# EAGLE board easyface485 (EAGLE 6.4)
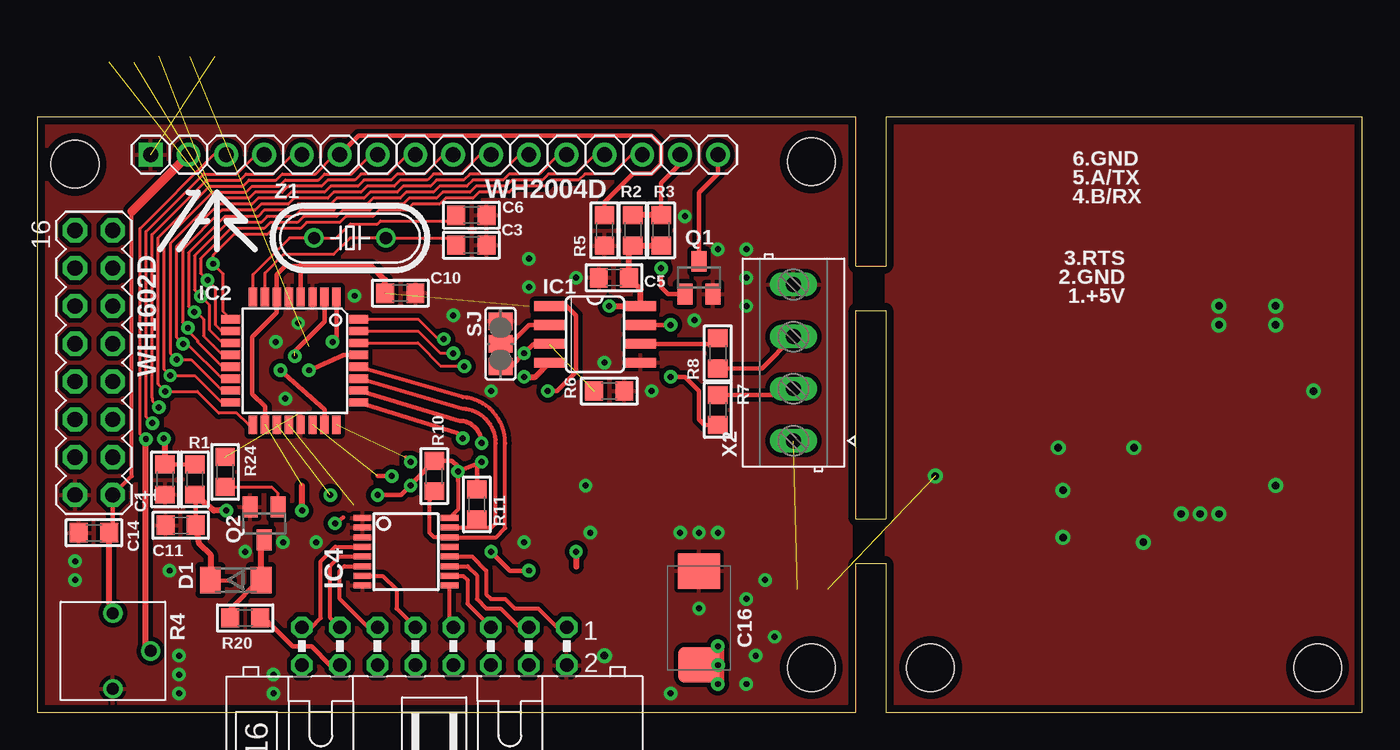
[diagram p0: board, top side]
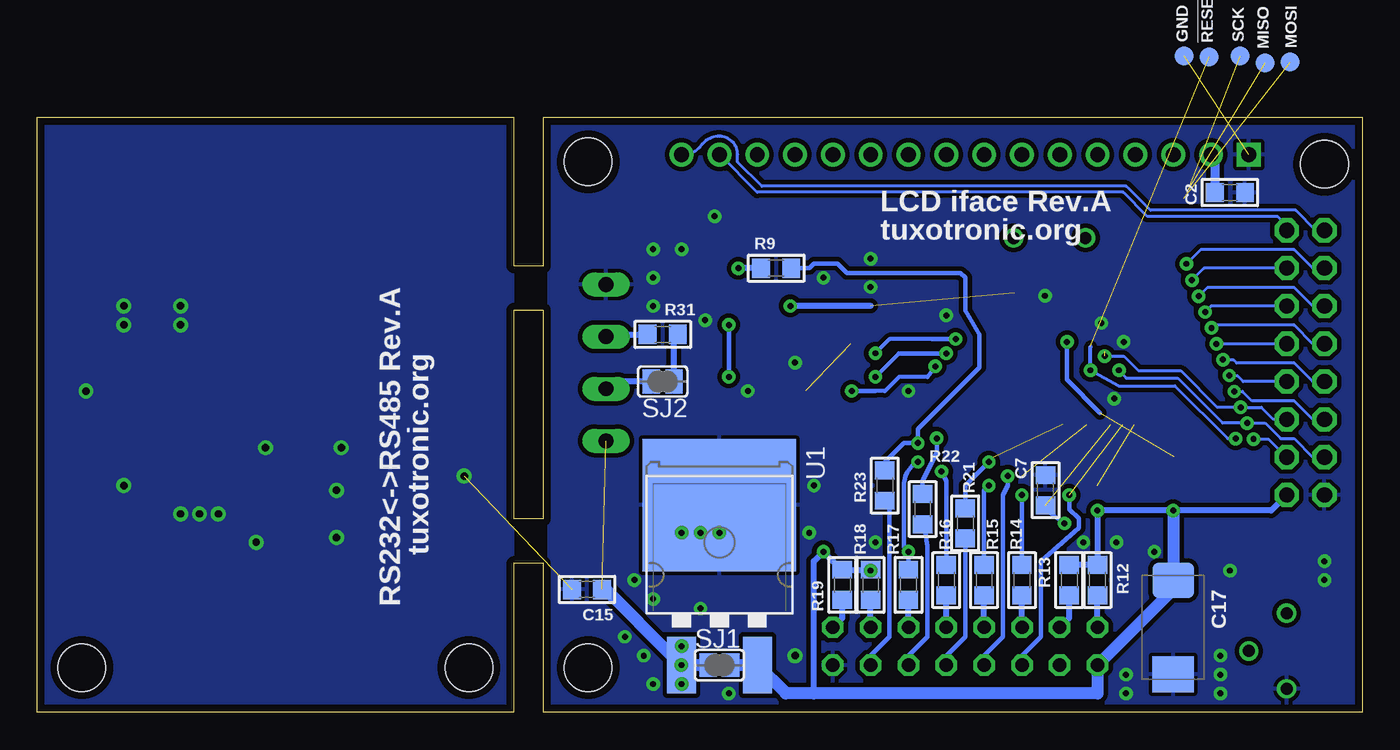
[diagram p1: board, bottom side, seen from below]

Size 89 x 40 mm. Coordinates in mm from the lower left corner, seen from the top.
Outline: 0,0 55,0 55,10 57,10 57,0 89,0 89,40 57,40 57,30 55,30 55,40 0,40 0,0
Outline: 55,13 55,27 57,27 57,13 55,13
Copper layers (1*16): Top 0.018mm / dielectric 1.5011mm / Bottom 0.018mm
Design rules "resonit-speed-18mkm *": minimum track width 0.2mm, minimum drill 0.4mm, track to track 0.2mm, track to pad 0.2mm, pad to pad 0.2mm, via to via 0.2mm, smd to smd 0.2mm, copper to edge 0.5mm, drill to drill 8mil, minimum pad ring 0.2489mm, minimum via ring 0.2489mm, stop-mask expansion 4mil, vias tented up to drill 0.5994mm, thermal gap 10mil
Net classes: 0 default: width 0.1 mm, drill 0.1 mm, clearance 0.1 mm
Holes 3.2 mm at 2.54,36.83 52,3 52,37 60,3 86,3

## Footprints (pad centres in the part's own frame; a part is rotated, then mirrored left to right if it is on the bottom)
B1,27 = smd 1.27 x 1.27: PP 0,0
C0805 = smd 1.2 x 1.3: 1 -1.016,0; 2 1.016,0
SMC_D = smd 2.4 x 2.8: + -3.15,0; - 3.15,0
SOD80 = smd 1.4 x 1.8: A 1.7,0; C -1.7,0
SO08 = smd 0.66 x 2.032: 1 -1.905,-3.073; 2 -0.635,-3.073; 3 0.635,-3.073; 4 1.905,-3.073; 5 1.905,3.073; 6 0.635,3.073; 7 -0.635,3.073; 8 -1.905,3.073
TQFP32-08 = smd 1.27 x 0.559: 1 -4.293,2.8; 2 -4.293,2; 3 -4.293,1.2; 4 -4.293,0.4; 5 -4.293,-0.4; 6 -4.293,-1.2; 7 -4.293,-2; 8 -4.293,-2.8; 17 4.293,-2.8; 18 4.293,-2; 19 4.293,-1.2; 20 4.293,-0.4; 21 4.293,0.4; 22 4.293,1.2; 23 4.293,2; 24 4.293,2.8 | smd 0.559 x 1.27: 9 -2.8,-4.293; 10 -2,-4.293; 11 -1.2,-4.293; 12 -0.4,-4.293; 13 0.4,-4.293; 14 1.2,-4.293; 15 2,-4.293; 16 2.8,-4.293; 25 2.8,4.293; 26 2,4.293; 27 1.2,4.293; 28 0.4,4.293; 29 -0.4,4.293; 30 -1.2,4.293; 31 -2,4.293; 32 -2.8,4.293
SSOP16 = smd 0.4 x 1.2: 1 -2.275,-2.925; 2 -1.625,-2.925; 3 -0.975,-2.925; 4 -0.325,-2.925; 5 0.325,-2.925; 6 0.975,-2.925; 7 1.625,-2.925; 8 2.275,-2.925; 9 2.275,2.925; 10 1.625,2.925; 11 0.975,2.925; 12 0.325,2.925; 13 -0.325,2.925; 14 -0.975,2.925; 15 -1.625,2.925; 16 -2.275,2.925
SOT23 = smd 1 x 1.4: 1 -0.95,-1.1; 2 0.95,-1.1; 3 0,1.1
R0805 = smd 1.2 x 1.3: 1 -1.016,0; 2 1.016,0
RTRIM-3362P = drill 0.8: 1 -2.54,0; 2 0,2.54; 3 2.54,0
SJ_2 = smd 1.168 x 1.6: 1 -1.524,0; 2 0,0; 3 1.524,0
SJ = smd 1.168 x 1.6: 1 -0.762,0; 2 0.762,0
ML16L = drill 0.9 octagon: 1 -8.89,-1.27; 2 -8.89,1.27; 3 -6.35,-1.27; 4 -6.35,1.27; 5 -3.81,-1.27; 6 -3.81,1.27; 7 -1.27,-1.27; 8 -1.27,1.27; 9 1.27,-1.27; 10 1.27,1.27; 11 3.81,-1.27; 12 3.81,1.27; 13 6.35,-1.27; 14 6.35,1.27; 15 8.89,-1.27; 16 8.89,1.27
D2PAK = smd 1.93 x 3.81: 1 -2.55,-8.25; 3 2.55,-8.25 | smd 10.3 x 8.9: 2 0,2.5
MA08-2 = drill 1.016 octagon: 1 -8.89,-1.27; 2 -8.89,1.27; 3 -6.35,-1.27; 4 -6.35,1.27; 5 -3.81,-1.27; 6 -3.81,1.27; 7 -1.27,-1.27; 8 -1.27,1.27; 9 1.27,-1.27; 10 1.27,1.27; 11 3.81,-1.27; 12 3.81,1.27; 13 6.35,-1.27; 14 6.35,1.27; 15 8.89,-1.27; 16 8.89,1.27
1X16RND = drill 1 square: 1 -19.05,0 | drill 1: 2 -16.51,0; 3 -13.97,0; 4 -11.43,0; 5 -8.89,0; 6 -6.35,0; 7 -3.81,0; 8 -1.27,0; 9 1.27,0; 10 3.81,0; 11 6.35,0; 12 8.89,0; 13 11.43,0; 14 13.97,0; 15 16.51,0; 16 19.05,0
DG350-3.5-04P = drill 1 long: 1 -5.25,0; 2 -1.75,0; 3 1.75,0; 4 5.25,0
HC49/S = drill 0.813: 1 -2.413,0; 2 2.413,0

## Placement (x,y rotation side)
!RESET  TPB1,27  [B1,27]  10.29,44.04 0 bottom  (outside the outline)
C1  0.1  [C0805]  8.59,15.65 90 top
C2  0.1  [C0805]  8.89,34.92 0 bottom
C3  22pF  [C0805]  29.16,31.39 180 top
C5  0.1  [C0805]  38.73,29.21 180 top
C6  22pF  [C0805]  29.16,33.4 180 top
C7  0.1  [C0805]  21.27,14.92 90 bottom
C10  0.1  [C0805]  24.38,28.17 0 top
C11  0.1  [C0805]  9.64,12.57 180 top
C14  0.1  [C0805]  3.81,12.06 180 top
C15  0.1  [C0805]  52.07,8.26 180 bottom
C16  100uF/16V  [SMC_D]  44.45,6.35 90 top
C17  220uF/6V3  [SMC_D]  12.7,5.71 270 bottom
D1  [SOD80]  13.34,8.89 0 top
GND  TPB1,27  [B1,27]  11.96,44.09 0 bottom  (outside the outline)
IC1  MAX487-S  [SO08]  37.47,25.4 270 top
IC2  ATMEGA88-16AU  [TQFP32-08]  17.3,23.62 270 top
IC4  PCA9534PW  [SSOP16]  24.77,10.79 270 top
MISO  TPB1,27  [B1,27]  6.53,43.64 0 bottom  (outside the outline)
MOSI  TPB1,27  [B1,27]  4.85,43.69 0 bottom  (outside the outline)
Q1  MMBT2222  [SOT23]  44.45,29.21 0 top
Q2  MMBT2222  [SOT23]  15.24,12.7 180 top
R1  10K  [R0805]  10.59,15.65 270 top
R2  10  [R0805]  40.01,32.38 90 top
R3  10  [R0805]  41.91,32.38 90 top
R4  [RTRIM-3362P]  5.08,4.13 270 top
R5  4.7K  [R0805]  38.1,32.38 90 top
R6  10K  [R0805]  38.42,21.59 180 top
R7  10  [R0805]  45.72,20.32 270 top
R8  10  [R0805]  45.72,24.13 90 top
R9  1K  [R0805]  39.37,29.84 180 bottom
R10  4.7K  [R0805]  26.67,15.88 90 top
R11  4.7K  [R0805]  29.53,13.97 90 top
R12  4.7K  [R0805]  17.78,8.89 90 bottom
R13  4.7K  [R0805]  19.68,8.89 90 bottom
R14  4.7K  [R0805]  22.86,8.89 90 bottom
R15  4.7K  [R0805]  25.4,8.89 90 bottom
R16  4.7K  [R0805]  27.94,8.89 90 bottom
R17  4.7K  [R0805]  30.48,8.57 90 bottom
R18  4.7K  [R0805]  33.02,8.57 90 bottom
R19  4.7K  [R0805]  34.92,8.57 90 bottom
R20  0  [R0805]  13.97,6.35 0 top
R21  0  [R0805]  26.67,12.7 270 bottom
R22  0  [R0805]  29.53,13.65 270 bottom
R23  0  [R0805]  32.07,15.24 270 bottom
R24  1K  [R0805]  12.62,16.15 270 top
R31  120  [R0805]  46.99,25.4 0 bottom
SCK  TPB1,27  [B1,27]  8.2,44.09 0 bottom  (outside the outline)
SJ  [SJ_2]  31.11,24.77 90 top
SJ1  [SJ]  43.18,3.17 0 bottom
SJ2  [SJ]  46.99,22.23 180 bottom
SV  [ML16L]  26.67,4.45 180 top
U1  L7805D2TT  [D2PAK]  43.18,11.43 0 bottom
U$  LOGO  [TT_LOGO]  12.06,33.66 0 top
WH1602D  [MA08-2]  3.81,23.5 90 top
WH2004D  [1X16RND]  26.67,37.47 0 top
X2  DG3XX-04-3.5  [DG350-3.5-04P]  50.8,23.5 90 top
Z1  14,7456 MHz  [HC49/S]  21.01,31.88 0 top

## Library data of the parts
!RESET GND MISO MOSI SCK = testpad
C1-C3 C5-C7 C10 C11 C14-C17 R1-R3 R5-R24 R31 = rc-master-smd
D1 = diodes
IC1 = interfaces
IC2 = avr-6
IC4 = micro-philips
Q1 Q2 = semiconductor
R4 = lcd-char
SJ SJ1 SJ2 Z1 = discrete
SV = con-ml
U1 = vreg-linear
U$ = logo
WH1602D = con-lstb
WH2004D = pinhead-fixdrills
X2 = degson

## Nets
!RESET: !RESET.PP C1.2 IC2.29 R1.1
+5V: C2.1 C5.1 C10.1 C11.1 C14.1 C17.+ D1.C IC1.8 IC2.4 IC2.6 IC2.18 IC4.16 R1.2 R2.1 R3.1 R4.1 R10.2 R11.2 R12.2 R13.2 R14.2 R15.2 R16.2 R17.2 R18.2 R19.2 SJ1.2 SV.16 U1.3 WH1602D.1 WH2004D.2
ADC6: IC2.19 SV.12
ADC7: IC2.22 SV.10
BL-A: R2.2 R3.2 WH1602D.15 WH2004D.15
BL-K: Q1.3 WH1602D.16 WH2004D.16
BUZZER: IC2.1 R24.1
DB0: IC2.16 MISO.PP WH1602D.7 WH2004D.7
DB1: IC2.15 MOSI.PP WH1602D.8 WH2004D.8
DB2: IC2.14 WH1602D.9 WH2004D.9
DB3: IC2.13 WH1602D.10 WH2004D.10
DB4: IC2.12 WH1602D.11 WH2004D.11
DB5: IC2.11 WH1602D.12 WH2004D.12
DB6: IC2.10 WH1602D.13 WH2004D.13
DB7: IC2.9 WH1602D.14 WH2004D.14
DE: IC1.3 IC2.32 R6.2 SJ.1
E: IC2.17 R5.2 SCK.PP WH1602D.6 WH2004D.6
GND: C1.1 C2.2 C3.1 C5.2 C6.1 C7.2 C10.2 C11.2 C14.2 C15.2 C16.- C17.- GND.PP IC1.5 IC2.3 IC2.5 IC2.21 IC4.1 IC4.2 IC4.3 IC4.8 Q1.2 Q2.2 R4.3 R5.1 R6.1 SJ.3 SV.2 U1.2 WH1602D.2 WH2004D.1 X2.4
LIGHT: IC2.26 R9.1 R23.1
N$1: R7.1 SJ2.2 X2.2
N$2: IC4.4 R12.1 SV.15
N$3: C7.1 IC2.20
N$4: IC1.2 SJ.2
N$5: IC4.5 R13.1 SV.13
N$6: Q2.1 R24.2
N$7: IC4.6 R14.1 SV.11
N$8: R20.2 SV.14
N$9: D1.A Q2.3 R20.1
N$10: IC4.7 R15.1 SV.9
N$11: Q1.1 R9.2
N$12: IC4.9 R16.1 SV.7
N$13: IC4.10 R17.1 SV.5
N$14: IC4.11 R18.1 SV.3
N$15: IC4.12 R19.1 SV.1
N$16: C3.2 IC2.7 Z1.2
N$17: R8.1 R31.1 X2.3
N$18: R21.2 SV.8
N$19: R22.2 SV.6
N$20: R23.2 SV.4
N$22: R31.2 SJ2.1
N$63: IC1.6 R8.2
N$64: IC1.7 R7.2
PC1: IC2.24 R21.1
PC2: IC2.25 R22.1
RS: IC2.23 WH1602D.4 WH2004D.4
RW: IC2.2 WH1602D.5 WH2004D.5
RXD: IC1.1 IC2.30
SCL: IC2.28 IC4.14 R10.1
SDA: IC2.27 IC4.15 R11.1
TXD: IC1.4 IC2.31
VDD: C15.1 C16.+ SJ1.1 U1.1 X2.1
VO: R4.2 WH1602D.3 WH2004D.3
XTAL2: C6.2 IC2.8 Z1.1

## Tracks (layer width: path | path; a pad name or v marks a point on that pad's centre or on a via)
!RESET  (via drill 0.4)  (1 unrouted)
  Top 0.305: C1.2 R1.1 | IC2.29 20.59,24.02 v18.25,22.99
  Top 0.406: v8.51,18.39 8.59,18.16 C1.2
  Bottom 0.203: v8.51,18.39 9.04,18.39 12.59,21.93 16.38,21.93 v18.25,22.99
  Bottom 0.254: v18.25,22.99 18.25,24.57
+5V  (via drill 0.4)  (2 unrouted)
  Top 0.254: 6.35,33.66 6.35,15.88 WH1602D.1 | 28.26,15.56 28.26,13.64 IC4.16
  Top 0.305: WH1602D.1 5.08,12.32 C14.1 | IC2.18 15.3,20.54 14.44,21.4 14.44,25.21 16.1,26.87 IC2.6 16.1,29.41 16.66,29.97 17.61,29.97 17.7,29.89 IC2.4 | IC4.16 27.69,13.09 | C11.1 10.65,14.26 R1.2 | D1.C 12.95,8.84 | v28.26,16.19 28.26,15.56 | v28.26,16.19 28.26,16.26 | v28.26,16.19 28.26,16.51 27.88,16.89 R10.2 25.4,15.62 v25.08,15.24 24.45,14.61 v22.86,14.61 | v28.26,16.19 v29.84,16.83 29.53,16.51 R11.2 | v33.02,9.53 31.75,9.53 v30.48,10.79
  Top 0.406: R3.1 R2.1 39.75,31.11 C5.1 40.54,28.42 IC1.8 v38.42,27.3 | 17.61,29.97 22.45,29.97 23.37,29.06 C10.1 | C14.1 4.83,7.37 R4.1 | v17.78,13.56 17.78,15.24 | v12.7,13.56 11.86,13.56 R1.2 | D1.C 11.63,10.59 10.86,11.37 C11.1 | v36.2,10.79 36.2,9.78
  Top 0.61: 6.35,33.66 WH2004D.2
  Bottom 0.305: R16.2 27.94,15.56 v28.26,16.19 | v25.08,15.24 25.4,14.92 R15.2 | v22.86,14.61 R14.2 | R17.2 v30.48,10.79 30.8,11.11 30.8,15.24 arc62 v29.84,16.83 | R18.2 v33.02,9.53
  Bottom 0.406: R13.2 R12.2 v17.78,13.56 v12.7,13.56 6.12,13.56 WH1602D.1 | R18.2 R19.2 35.31,9.91 v36.2,10.79 36.83,10.16 36.83,1.27 | 33.02,27.3 v38.42,27.3
  Bottom 0.61: C2.1 9.91,37.21 WH2004D.2
  Bottom 0.813: v12.7,13.56 C17.+ 12.7,8.26 SV.16 17.78,1.27 36.83,1.27 38.72,1.27 U1.3 SJ1.2
ADC6  (via drill 0.4)  (1 unrouted)
  Top 0.305: v19.68,14.61 19.75,14.68
  Bottom 0.305: SV.12 22.86,3.81 21.59,5.08 21.59,10.16 19.05,12.38 19.05,13.02 19.68,13.65 v19.68,14.61
ADC7  (via drill 0.4)  (1 unrouted)
  Top 0.305: v23.81,15.88 22.86,15.88
  Bottom 0.305: SV.10 25.4,3.81 24.13,5.08 24.13,14.61 23.81,15.24 v23.81,15.88
BL-A
  Top 0.305: WH2004D.15 43.18,36.83 41.91,35.56 R3.2
  Top 0.406: R3.2 R2.2
  Bottom 0.203: WH1602D.15 5.08,32.72 5.69,33.33 14.43,33.33 16.05,34.95 40.64,34.95 43.16,37.47 WH2004D.15
BL-K
  Top 0.305: Q1.3 44.45,34.92 45.72,36.2 WH2004D.16
  Bottom 0.203: WH1602D.16 3.12,32.38 4.47,33.73 14.22,33.73 15.85,35.36 40.34,35.36 41.96,36.98 41.96,37.49 arc-90 43.18,38.71 arc-53 44.4,38.1 arc55 WH2004D.16
BUZZER  (via drill 0.4)  (1 unrouted)
  Top 0.305: IC2.1 20.1,25.15 v19.84,24.89
  Bottom 0.305: v19.84,24.89 19.84,22.35 17.61,20.13
DB0  (via drill 0.4)  (1 unrouted)
  Top 0.203: WH2004D.7 22.43,37.47 21.13,36.17 19.3,36.17 18.9,35.76 16.66,35.76 16.26,35.36 14.43,35.36 14.02,34.95 11.79,34.95 8.53,31.7 8.53,23.02 v8.93,22.63 10.59,22.63 12.4,20.82 IC2.16
  Bottom 0.203: WH1602D.7 8,22.23 8.41,22.63 v8.93,22.63
DB1  (via drill 0.4)  (1 unrouted)
  Top 0.203: WH2004D.8 24.87,37.47 23.57,36.17 21.74,36.17 21.34,35.76 19.51,35.76 19.1,35.36 16.87,35.36 16.46,34.95 14.63,34.95 14.22,34.54 11.99,34.54 8.94,31.5 8.94,24.12 v9.36,23.7 10.34,23.7 12.41,21.62 IC2.15
  Bottom 0.203: WH1602D.8 3.33,22.23 4.57,23.47 8.43,23.47 8.66,23.7 v9.36,23.7
DB2  (via drill 0.4)
  Top 0.203: WH2004D.9 27.3,37.47 26.01,36.17 24.18,36.17 23.77,35.76 21.95,35.76 21.54,35.36 19.71,35.36 19.3,34.95 17.07,34.95 16.66,34.54 14.83,34.54 14.43,34.14 12.19,34.14 9.35,31.29 9.35,25.21 v9.79,24.77 10.08,24.77 12.43,22.42 IC2.14
  Bottom 0.203: WH1602D.9 v9.79,24.77
DB3  (via drill 0.4)
  Top 0.203: WH2004D.10 29.74,37.47 28.45,36.17 26.62,36.17 26.21,35.76 24.38,35.76 23.98,35.36 22.15,35.36 21.74,34.95 19.91,34.95 19.51,34.54 17.27,34.54 16.87,34.14 15.04,34.14 14.63,33.73 12.39,33.73 9.75,31.09 9.75,26.2 v10.12,25.83 10.12,25.64 10.77,24.99 10.77,24.89 12.44,23.22 IC2.13
  Bottom 0.203: WH1602D.10 3.33,24.77 4.57,26.01 9.94,26.01 v10.12,25.83
DB4  (via drill 0.4)
  Top 0.203: WH2004D.11 32.38,37.47 31.09,36.17 29.06,36.17 28.65,35.76 26.82,35.76 26.42,35.36 24.59,35.36 24.18,34.95 22.35,34.95 21.95,34.54 20.12,34.54 19.71,34.14 17.48,34.14 17.07,33.73 15.24,33.73 14.83,33.33 12.6,33.33 10.16,30.89 10.16,27.29 v10.55,26.9 10.69,26.9 11.18,26.42 11.18,25.3 12.45,24.02 IC2.12
  Bottom 0.203: WH1602D.11 10.15,27.3 v10.55,26.9
DB5  (via drill 0.4)
  Top 0.203: WH2004D.12 35.03,37.47 33.73,36.17 31.7,36.17 31.29,35.76 29.26,35.76 28.85,35.36 27.03,35.36 26.62,34.95 24.79,34.95 24.38,34.54 22.55,34.54 22.15,34.14 20.32,34.14 19.91,33.73 17.68,33.73 17.27,33.33 15.44,33.33 15.04,32.92 12.8,32.92 10.57,30.68 10.57,28.38 v10.99,27.96 11.58,27.37 11.58,25.7 12.46,24.82 IC2.11
  Bottom 0.203: WH1602D.12 3.33,27.3 4.57,28.55 10.4,28.55 v10.99,27.96
DB6  (via drill 0.4)
  Top 0.203: WH2004D.13 37.47,37.47 36.17,36.17 34.34,36.17 33.93,35.76 31.9,35.76 31.5,35.36 29.46,35.36 29.06,34.95 27.23,34.95 26.82,34.54 24.99,34.54 24.59,34.14 22.76,34.14 22.35,33.73 20.52,33.73 20.12,33.33 17.88,33.33 17.48,32.92 15.65,32.92 15.24,32.51 13.01,32.51 10.97,30.48 10.97,29.5 v11.44,29.03 11.99,28.49 11.99,26.01 12.38,25.62 IC2.10
  Bottom 0.203: WH1602D.13 10.63,29.84 v11.44,29.03
DB7  (via drill 0.4)
  Top 0.203: WH2004D.14 39.9,37.47 38.61,36.17 36.78,36.17 36.37,35.76 34.54,35.76 34.14,35.36 32.11,35.36 31.7,34.95 29.67,34.95 29.26,34.54 27.43,34.54 27.03,34.14 25.2,34.14 24.79,33.73 22.96,33.73 22.55,33.33 20.73,33.33 20.32,32.92 18.09,32.92 17.68,32.51 15.85,32.51 15.44,32.11 13.21,32.11 11.79,30.68 11.79,30.16 v11.81,30.14 12.5,29.45 12.5,26.93 IC2.9
  Bottom 0.203: WH1602D.14 3.33,29.84 4.57,31.09 10.86,31.09 v11.81,30.14
DE  (via drill 0.4)  (1 unrouted)
  Top 0.203: IC2.32 25.6,26.42 26.94,25.08 v27.3,25.08
  Top 0.305: IC1.3 33.34,24.77 v32.7,24.13 31.81,23.24 SJ.1
  Bottom 0.254: 28.89,25.08 31.75,25.08 v32.7,24.13
  Bottom 0.305: v27.3,25.08 28.89,25.08
E  (via drill 0.4)  (1 unrouted)
  Top 0.203: WH2004D.6 19.99,37.47 18.69,36.17 16.46,36.17 16.05,35.76 14.22,35.76 13.82,35.36 11.58,35.36 8.13,31.9 8.13,22.04 v8.6,21.57 10.74,21.57 12.19,20.12 13.41,20.12 14.2,19.33 IC2.17
  Top 0.305: R5.2 38.1,34.29 40.01,36.2 41.27,36.2 41.91,36.83 41.91,38.1 41.27,38.73 21.59,38.73 WH2004D.6
  Bottom 0.203: WH1602D.6 3.33,19.68 4.57,20.93 7.42,20.93 8.05,21.57 v8.6,21.57
GND  (via drill 0.4, 0.5)  (2 unrouted)
  other vias: 16.03,24.89 16.66,21.08 30.48,21.59 33.02,28.57 33.02,30.48 36.2,29.21 21.31,27.99 27.94,26.67 17.53,26.16 15.88,1.27 45.72,31.11 36.83,15.24 37.15,12.06 13.97,10.79 16.51,11.43 8.89,9.53 44.45,12.06 45.72,12.06 43.18,12.06 44.45,6.99 47.62,7.62 9.53,2.54 9.53,1.27 15.88,2.54 38.1,3.81 47.62,1.91 48.26,3.81 49.53,5.08 48.9,8.89 47.62,27.3 47.62,29.21 47.62,31.11 38.1,23.5 18.73,11.43 42.55,1.27 41.27,21.59 43.5,33.34 44.13,26.35 9.53,3.81 2.54,10.16 2.54,8.89 32.7,11.43 68.58,17.78 73.66,17.78 83.19,15.24 85.72,21.59 60.33,15.88 68.9,11.75 68.9,14.92 76.83,13.34 78.11,13.34 79.38,13.34 79.38,26.04 83.19,26.04 83.19,27.3 79.38,27.3 74.3,11.43
  pour Bottom (isolate 0.305): 0,40.01 54.61,40.01 54.61,0 0,0
  pour Top (isolate 0.305): 0,40.01 54.61,40.01 54.61,0 0,0
  pour Top (isolate 0.406): 57.15,40.01 89.53,40.01 89.53,0 57.15,0
  pour Bottom (isolate 0.406): 57.15,40.01 89.53,40.01 89.53,0 57.15,0
LIGHT  (via drill 0.4)
  Top 0.305: IC2.26 28.35,19.59 arc-90 v29.84,18.1
  Bottom 0.305: R23.1 32.07,16.83 30.8,18.1 v29.84,18.1 29.84,19.05 25.72,23.18 25.72,25.4 26.67,26.99 26.67,29.21 26.99,29.53 34.61,29.53 35.24,30.16 36.83,30.16 37.15,29.84 R9.1
N$1
  Top 0.305: R7.1 50.39,21.34 X2.2
  Bottom 0.406: SJ2.2 50.32,22.23 X2.2
N$2
  Top 0.254: IC4.4 20.01,11.12 19.05,10.16 19.05,6.35 18.41,5.71 SV.15
  Bottom 0.406: SV.15 R12.1
N$3  (via drill 0.4)  (1 unrouted)
  Top 0.305: v20,12.7 20.55,13.1
  Bottom 0.305: C7.1 21.27,13.65 v20,12.7
N$4
  Top 0.305: SJ.2 31.75,24.77 33.02,26.04 IC1.2
N$5
  Top 0.254: IC4.5 20.31,10.47 19.68,9.84 19.68,6.35 SV.13
  Bottom 0.406: R13.1 19.68,6.35 SV.13
N$6
  Top 0.203: R24.2 15.75,15.14 16.19,14.7 Q2.1
N$7
  Top 0.254: IC4.6 20.61,9.82 20.32,9.53 20.32,7.62 22.23,5.71 SV.11
  Bottom 0.406: SV.11 R14.1
N$8
  Top 0.305: SV.14 19.68,3.17 18.41,4.45 17.14,4.45 15.24,6.35 R20.2
N$9
  Top 0.305: R20.1 12.95,6.92 14.92,8.89 D1.A
  Top 0.406: D1.A 15.04,11.39 Q2.3
N$10
  Top 0.254: IC4.7 23.21,9.17 24.13,8.26 24.13,6.99 SV.9
  Bottom 0.406: SV.9 R15.1
N$11  (via drill 0.4)
  Top 0.305: v41.91,29.84 41.91,28.57 42.38,28.11 Q1.1
  Bottom 0.406: R9.2 v41.91,29.84
N$12
  Top 0.254: IC4.9 27.69,5.96 SV.7
  Bottom 0.406: SV.7 R16.1
N$13
  Top 0.254: IC4.10 28.61,9.17 28.89,8.89 28.89,7.3 SV.5
  Bottom 0.406: SV.5 R17.1
N$14
  Top 0.254: IC4.11 28.91,9.82 29.53,9.21 29.53,7.62 30.16,6.99 31.11,6.99 32.38,5.71 SV.3
  Bottom 0.406: SV.3 R18.1
N$15
  Top 0.254: IC4.12 29.22,10.47 30.16,9.53 30.16,7.94 30.48,7.62 31.43,7.62 32.07,6.99 33.66,6.99 34.92,5.71 SV.1
  Bottom 0.406: R19.1 34.92,6.35 SV.1
N$16
  Top 0.203: IC2.7 15.3,29.52 16.56,30.79 19.91,30.79 21.01,31.88 Z1.2 27.66,31.88 C3.2
N$17
  Top 0.305: R8.1 48.67,23.11 X2.3
  Bottom 0.305: 50.63,25.4 50.65,25.4 X2.3
  Bottom 0.406: 50.63,25.4 R31.1
N$18
  Bottom 0.305: SV.8 27.94,3.81 26.67,5.08 R21.2
N$19
  Bottom 0.305: SV.6 30.48,3.81 29.21,5.08 29.21,10.79 arc-20 R22.2
N$20
  Bottom 0.305: SV.4 33.02,3.81 31.75,5.08 31.75,13.91 R23.2
N$22
  Bottom 0.406: SJ2.1 46.23,25.15 R31.2
N$63
  Top 0.305: IC1.6 45.34,24.77 R8.2
N$64  (via drill 0.4)
  Top 0.305: v42.55,26.04 IC1.7 | R7.2 44.83,19.3 44.45,19.68 44.45,21.59 43.5,22.54 v42.55,22.54
  Bottom 0.305: v42.55,22.54 v42.55,26.04
PC1  (via drill 0.4)  (1 unrouted)
  Top 0.305: v25.08,16.83 24.77,17.14
  Bottom 0.305: v25.08,16.83 26.67,15.24 R21.1
PC2  (via drill 0.4)
  Top 0.305: IC2.25 28.2,18.79 v28.57,18.41
  Bottom 0.305: v28.57,18.41 28.57,17.46 29.53,15.56 R22.1
RS  (via drill 0.4)
  Top 0.203: WH2004D.4 14.71,37.47 13.41,36.17 11.18,36.17 7.32,32.31 7.32,19.85 v7.73,19.43
  Top 0.305: IC2.23 19.3,20.35 v16.34,22.99
  Bottom 0.203: v16.34,22.99 16.34,22.95 15.85,22.45 12.39,22.45 9.37,19.43 v7.73,19.43 6.53,19.43 5.49,18.39 4.57,18.39 3.33,17.14 WH1602D.4
RW  (via drill 0.4)  (1 unrouted)
  Top 0.203: WH2004D.5 17.14,37.47 15.85,36.17 14.02,36.17 13.61,35.76 11.38,35.76 7.72,32.11 7.72,21.13 7.73,20.93 v8.17,20.5
  Top 0.305: IC2.2 19.3,26.26 17.3,24.26
  Bottom 0.203: v17.3,23.94 16.02,23.94 15.04,22.96 12.19,22.96 9.73,20.5 v8.17,20.5 6.78,20.5 5.97,19.68 WH1602D.5
RXD  (via drill 0.4)
  Top 0.203: IC2.30 25.57,24.82 27.14,23.25 v28.68,23.25
  Top 0.305: IC1.1 35.56,27.3 36.2,26.67 36.2,22.86 34.92,21.59 v34.29,21.59 34.39,21.49
  Bottom 0.254: 32.7,21.59 32.07,21.59 31.11,22.54 29.21,22.54
  Bottom 0.305: v28.68,23.25 29.21,22.54 | 32.7,21.59 v34.29,21.59
SCL
  Top 0.254: IC2.28 28.57,21.19 arc-85 31.43,18.1 31.43,12.38 30.82,11.77 IC4.14 26.65,11.77 26.35,12.06 26.35,14.22 R10.1
SDA
  Top 0.254: IC4.15 29.21,12.42 | 29.21,12.42 30.52,12.42 30.8,12.7 30.8,18.1 arc88 28.57,20.39 IC2.27 | R11.1 29.53,12.74 29.21,12.42
TXD  (via drill 0.4)
  Top 0.203: IC2.31 25.58,25.62 27.09,24.12 v27.94,24.12
  Top 0.406: v32.7,22.54 33.44,22.54 IC1.4
  Bottom 0.254: 31.13,24.12 v32.7,22.54
  Bottom 0.305: v27.94,24.12 31.13,24.12
VDD  (via drill 0.4)  (1 unrouted)
  Top 0.813: C16.+ 45.71,3.2 U1.1 | v45.72,4.45 v45.72,1.91
  Bottom 0.406: 50.8,8.26 C15.1
  Bottom 0.813: 46.35,3.81 50.8,8.26 | U1.1 SJ1.1 | U1.1 46.35,3.81 | U1.1 | 46.35,3.81 v45.72,4.45
  other vias: 45.73,3.18
VO  (via drill 0.4)
  Top 0.203: v7.3,18.36 7.24,18.36 6.91,18.69 6.91,32.51 11.86,37.47 WH2004D.3
  Top 0.406: R4.2 7.3,4.13 v7.3,18.36
  Bottom 0.203: v7.3,18.36 6.3,18.36 WH1602D.3
XTAL2
  Top 0.203: IC2.8 14.5,29.43 16.94,31.88 Z1.1 20.09,31.88 21.03,32.82 22.86,32.82 23.06,33.02 27.76,33.02 C6.2

## Text on the board
tPlace: 6.GND | 5.A/TX | 4.B/RX | 3.RTS | 2.GND | 1.+5V
bPlace: LCD iface Rev.A | tuxotronic.org | RS232<->RS485 Rev.A | tuxotronic.org